# Altium PCB BugBuster_DAQ.PcbDoc (part 5 of 5)
Units mm, origin at the board's own origin, x right, y up, seen from the top; angles counter-clockwise.
Board outline 110 x 80 mm, 6 copper layers (Top Layer, Inner Layer 1, Inner Layer 2, Inner Layer 3, Inner Layer 4, Bottom Layer), stack 1.202 mm thick; 245 components, 205 nets, 1250 pads, 1565 vias.
Unrouted connection lines stored in the file: 8.
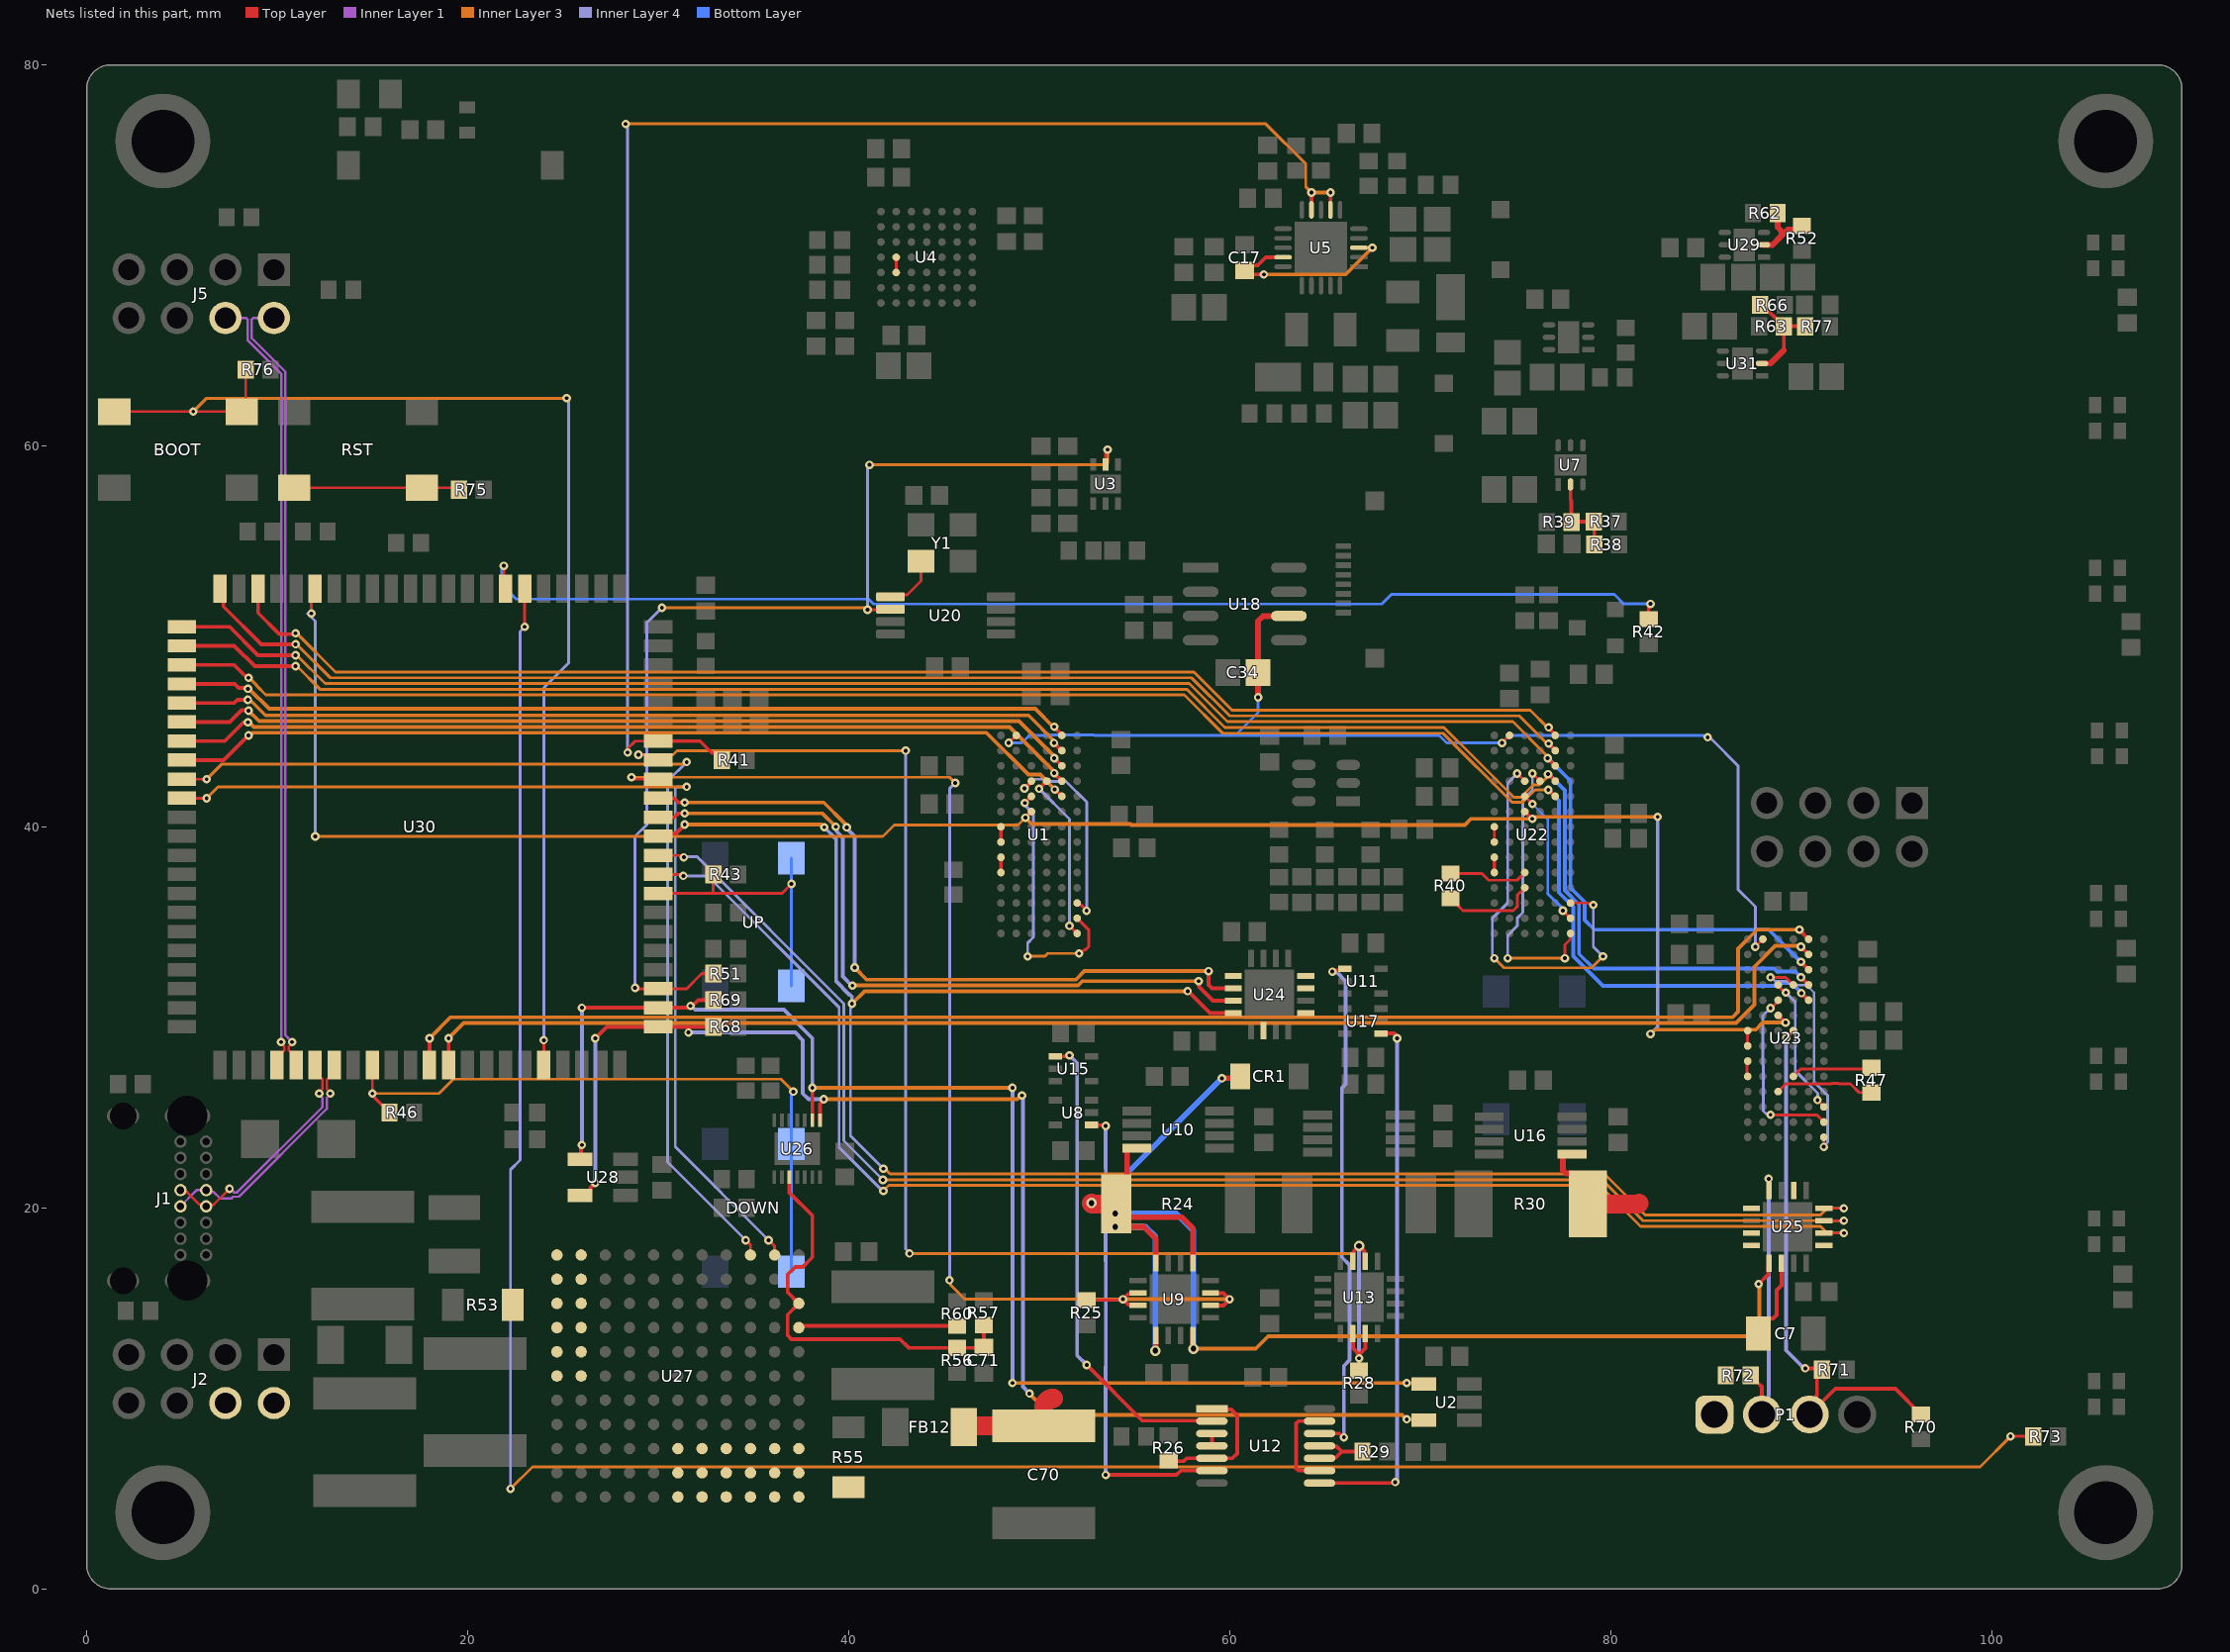
[diagram p8: the nets of this part, all layers, seen from the top]

## Via types
v1: diameter 0.55, hole 0.25, Top Layer to Bottom Layer, tented both sides, 1062 vias
v2: diameter 0.45, hole 0.2, Top Layer to Bottom Layer, tented both sides, 408 vias
v3: diameter 0.55, hole 0.3, Top Layer to Bottom Layer, tented both sides, 78 vias
v4: diameter 0.6, hole 0.35, Top Layer to Bottom Layer, tented both sides, 9 vias
v5: diameter 0.5, hole 0.2, Top Layer to Bottom Layer, tented both sides, 6 vias
v6: diameter 0.65, hole 0.35, Top Layer to Bottom Layer, tented both sides, 2 vias

## Nets (pads, with @x,y where several pads share a name; then routed paths per layer and width w, separated by ;. In a path a pad name is that pad's centre, name@x,y a point inside that pad or via, vN(x,y) a via of type N, cw(c..) or ccw(c..) an arc to the next point about the centre after c; other vN are vias at no path point) (continued)
NetR25_2: R25.2 U9.6 U9.7 U9.14 U9.15 U30.80 | length 66.1
  Top Layer w0.15: v2(28.6,42.6) 28.681,42.6 28.781,42.5 U30.80@30,42.5 ; R25.2@52.5,15.15 54.35,15.15 v2(54.4,15.2)
  Top Layer w0.2: U9.7@55.198,14.875 55.148,14.925 54.675,14.925 v2(54.4,15.2) 54.675,15.475 55.148,15.475 U9.6@55.198,15.525 ; U9.14@59.002,14.875 59.675,14.875 v2(60,15.2) 59.675,15.525 U9.15@59.002,15.525
  Inner Layer 3 w0.15: v2(28.6,42.6) 45.3,42.6 v2(45.6,42.3) ; v2(45.3,16.2) 45.357,16.143 45.357,15.943 46.1,15.2 v2(54.4,15.2)
  Inner Layer 3 w0.2: v2(54.4,15.2) v2(60,15.2)
  Inner Layer 4 w0.15: v2(45.3,16.2) 45.3,42 v2(45.6,42.3)
NetR26_2: R26.2 U12.1 U12.5 | length 7.1
  Top Layer w0.2: R26.2@57,6.45 57.25,6.7 57.6,6.7 57.75,6.85 60.15,6.85 60.4,7.1 60.4,9.1 60.083,9.417 59.108,9.417 U12.1@59.075,9.45
NetR28_2: R28.2 U13.6 U13.7 U13.14 U13.15 U30.81 | length 76.6
  Top Layer w0.15: v2(28.966,43.787) 28.978,43.775 29.725,43.775 U30.81@30,43.5
  Top Layer w0.2: U13.14@66.475,13.398 66.5,13.373 66.5,12.6 v2@66.8,12.3 ; U13.7@66.475,17.202 66.525,17.252 66.525,17.725 v3(66.8,18) 67.075,17.725 67.075,17.252 U13.6@67.125,17.202 ; R28.2@66.808,11.442 R28.2@66.8,11.45 v2(66.8,12.1) v2@66.8,12.3 ; U13.15@67.125,13.398 67.125,12.625 v2@66.8,12.3
  Inner Layer 3 w0.15: v2(28.966,43.787) 30.787,43.787 31,44 42.8,44 42.838,43.962 42.962,43.962 v2(43,44) ; v2(43.2,17.6) 66.4,17.6 v3(66.8,18)
  Inner Layer 4 w0.15: v2(43,44) 43,17.838 43.2,17.638 v2(43.2,17.6)
  Inner Layer 4 w0.2: v2(66.8,12.1) v3(66.8,18)
NetR29_2: R29.2 U12.10 U12.11 | length 3.8
  Top Layer w0.2: U12.10@64.725,6.85 64.76,6.885 65.585,6.885 65.9,7.2 ; U12.11@64.725,7.5 64.753,7.472 65.628,7.472 65.9,7.2 ; R29.2@67,7.05 66.85,7.2 65.9,7.2
NetR37_2: R37.2 R38.2 R39.2 U7.2 | length 4.4
  Top Layer w0.2: U7.2@77.9,57.972 77.9,57.175 77.95,57.125 R39.2@77.95,56 77.973,56.023 R37.2@79.13,56.023 79.15,56.003 R38.2@79.15,54.825
NetR40_1: R40.1 U22.C5 | length 4.2
  Top Layer w0.15: R40.1@71.6,37.55 73.25,37.55 73.6,37.2 75.1,37.2 U22.C5@75.5,37.6
NetR40_2: R40.2 U22.C4 | length 5
  Top Layer w0.15: R40.2@71.6,36.25 71.65,36.25 72,35.9 72,35.85 72.25,35.6 74.9,35.6 75.1,35.8 75.1,36.4 U22.C4@75.5,36.8
NetR41_1: R41.1 U5.7 U5.9 U30.82 | length 79.8
  Top Layer w0.15: v2(28.4,43.9) 28.4,44.1 28.8,44.5 U30.82@30,44.5
  Top Layer w0.2: U30.82@30,44.5 32.2,44.5 32.825,43.875 33.025,43.875 33.35,43.55 R41.1@33.35,43.5 ; U5.9@64.3,72.391 v2(64.3,73.3) ; U5.7@65.3,72.391 v2(65.3,73.3)
  Inner Layer 3 w0.15: v2(28.3,76.9) 61.9,76.9 64,74.8 64,73.6 v2(64.3,73.3)
  Inner Layer 3 w0.2: v2(64.3,73.3) v2(65.3,73.3)
  Inner Layer 4 w0.15: v2(28.3,76.9) 28.3,76.819 28.4,76.719 v2(28.4,43.9)
NetR42_2: R42.2 U30.7 | length 64.3
  Top Layer w0.15: v2(21.9,53.7) 21.9,52.6 U30.7@22,52.5 ; R42.2@82,50.9 82,51.519 82.1,51.619 v2(82.1,51.7)
  Bottom Layer w0.15: v2(21.9,53.7) 21.9,53.619 21.8,53.519 21.8,52.7 22.546,51.954 41.05,51.954 41.308,51.696 67.996,51.696 68.5,52.2 80.2,52.2 80.7,51.7 v2(82.1,51.7)
NetR47_1: R47.1 U23.D5 | length 4.3
  Top Layer w0.15: U23.D5@89.6,26.9 89.98,27.28 93.63,27.28 R47.1@93.7,27.35
NetR47_2: R47.2 U23.C4 | length 5.3
  Top Layer w0.15: U23.C4@88.8,26.1 89.2,26.5 91.596,26.5 91.623,26.527 91.977,26.527 92.004,26.5 92.6,26.5 93.05,26.05 R47.2@93.7,26.05
NetR51_1: R51.1 U3.5 U20.2 U30.69 | length 58.8
  Top Layer w0.15: v2(28.79,31.543) 28.833,31.5 U30.69@30,31.5 31.5,31.5 32.3,32.3 R51.1@32.9,32.3 ; v2(41,51.4) 42.175,51.4 U20.2@42.2,51.425 ; U3.5@53.5,59.025 53.5,59.619 53.6,59.719 v2(53.6,59.8)
  Inner Layer 3 w0.15: v2(30.2,51.5) 40.819,51.5 40.919,51.4 v2(41,51.4) ; v2(41.1,59) 53.512,59 53.6,59.088 v2(53.6,59.8)
  Inner Layer 4 w0.15: v2(28.79,31.543) 28.79,39.49 29.4,40.1 29.4,50.7 v2(30.2,51.5) ; v2(41,51.4) 41,58.819 41.1,58.919 v2(41.1,59)
NetR52_2: R52.2 R62.2 U29.2 | length 3.7
  Top Layer w0.3: U29.2@88.053,70.55 88.5,70.55 88.976,71.026 ; R62.2@88.775,72.225 88.775,71.475 88.976,71.274 88.976,71.026 ; R52.2@90.05,71.55 89.857,71.357 89.307,71.357 88.976,71.026
NetR53_2: R53.2 U27.F10 U27.F11 U27.G10 U27.G11 U27.H10 U27.H11 U27.J10 U27.J11 U27.K10 U27.K11 U27.L10 U27.L11
NetR55_1: R55.1 U27.A1 U27.A2 U27.A3 U27.A4 U27.A5 U27.A6 U27.B1 U27.B2 U27.B3 U27.B4 U27.B5 U27.B6 U27.C1 U27.C2 U27.C3 U27.C4 U27.C5 U27.C6
NetR60_2: R60.2 U27.H1 | length 8.3
  Top Layer w0.2: U27.H1@37.39,13.71 37.498,13.71 37.588,13.8 R60.2@45.7,13.8
NetR63_2: R63.2 R66.2 R77.2 U31.2 | length 5.6
  Top Layer w0.2: R66.2@87.85,67.4 87.85,67.35 88.175,67.025 88.34,67.025 88.641,66.723 88.647,66.723 88.72,66.65 88.77,66.65 89.095,66.325 R63.2@89.095,66.275 ; 89.1,65.025 89.1,66.27 R63.2@89.095,66.275 ; R77.2@90.217,66.275 R63.2@89.095,66.275
  Top Layer w0.3: U31.2@87.953,64.325 88.4,64.325 89.1,65.025
NetR68_1: R68.1 U2.5 U26.1 U28.5 U30.67 | length 74.2
  Top Layer w0.2: U28.5@25.9,20.65 26.2,20.65 26.45,20.9 26.45,21.05 v2(26.7,21.3) ; v2(26.7,28.9) 27.3,29.5 U30.67@30,29.5 31.6,29.5 ; v2(31.6,29.2) 31.6,29.5 ; R68.1@32.6,29.5 31.6,29.5 ; U26.1@38.5,24.599 38.5,25.458 38.7,25.658 v2(38.7,25.7) ; v2(69.3,8.9) 70.15,8.9 U2.5@70.2,8.85
  Inner Layer 3 w0.2: v2(38.7,25.7) 48.858,25.7 49.058,25.9 v2(49.1,25.9) ; v2(49.5,10.25) 50.625,9.125 69.058,9.125 69.283,8.9 v2(69.3,8.9)
  Inner Layer 4 w0.2: v2(26.7,21.3) v2(26.7,28.9) ; v2(31.6,29.2) 37.2,29.2 37.6,28.8 37.6,26 37.9,25.7 v2(38.7,25.7) ; v2(49.1,25.9) 49.148,25.852 49.148,10.602 v2(49.5,10.25)
NetR69_1: R69.1 U2.4 U26.2 U28.4 U30.68 | length 74.1
  Top Layer w0.2: U28.4@25.9,22.55 25.96,22.61 25.96,23.26 v2(26,23.3) ; v2(26,30.5) U30.68@30,30.5 31.7,30.5 32.1,30.9 R69.1@32.9,30.9 ; U26.2@38.1,24.599 v2(38.1,26.3) ; v2(69.3,10.8) 70.15,10.8 U2.4@70.2,10.75
  Inner Layer 3 w0.2: v2(38.1,26.3) v2(48.6,26.3) ; v2(48.6,10.8) v2(69.3,10.8)
  Inner Layer 4 w0.2: v2(26,23.3) v2(26,30.5) ; v2(31.7,30.6) 31.742,30.6 31.942,30.4 36.6,30.4 38.1,28.9 v2(38.1,26.3) ; v2(48.6,10.8) v2(48.6,26.3)
NetR73_2: R73.2 U30.6 | length 128.6
  Top Layer w0.15: v2(23,50.5) U30.6@23,52.5 ; v2(101,8) R73.2@102.2,8
  Inner Layer 3 w0.15: v2(22.25,5.25) 23.4,6.4 99.4,6.4 v2(101,8)
  Inner Layer 4 w0.15: v2(22.25,5.25) 22.25,22 22.75,22.5 22.75,50.25 v2(23,50.5)
NetR75_2: R75.2 RST.A1 RST.A2 | length 8.7
  Top Layer w0.15: RST.A2@10.9,57.8 RST.A1@17.6,57.8 19.45,57.8 R75.2@19.55,57.7
NetU1_A5: U1.A5 U1.A6 | length 0.8
  Top Layer w0.2: U1.A5@48,37.6 U1.A6@48,38.4
NetU1_A7: U1.A7 U1.A8 | length 0.8
  Top Layer w0.2: U1.A7@48,39.2 U1.A8@48,40
NetU1_C9: U1.C9 U22.C9 U23.C9 U30.17 | length 105.1
  Top Layer w0.15: v2(11.8,51.2) 11.8,52.3 U30.17@12,52.5
  Top Layer w0.2: v2(49.28,40.48) U1.C9@49.6,40.8 ; U22.C9@75.5,40.8 75.88,40.42 v2(75.895,40.42) ; U23.C9@88.8,30.1 89.18,29.72 v2(89.195,29.72)
  Inner Layer 3 w0.15: v2(12,39.5) 41.8,39.5 42.4,40.1 48.9,40.1 v2(49.28,40.48)
  Inner Layer 3 w0.2: v2(49.28,40.48) 49.608,40.152 54.787,40.152 54.839,40.1 72.35,40.1 72.67,40.42 v2(75.895,40.42) 75.963,40.42 76.067,40.525 v2(82.475,40.525) ; v2(82.1,29.125) 82.117,29.125 82.342,29.35 87.625,29.35 87.995,29.72 v2(89.195,29.72)
  Inner Layer 4 w0.15: v2(11.8,51.2) 11.6,51.2 12,50.8 v2(12,39.5)
  Inner Layer 4 w0.2: v2(82.1,29.125) 82.475,29.5 v2(82.475,40.525)
NetU1_C10: U1.C10 U1.F2 | length 14
  Top Layer w0.15: U1.F2@52,35.2 52.6,34.6 52.6,33.7 52.441,33.541 52.37,33.541 52.181,33.352 v2(52.1,33.352)
  Top Layer w0.2: v2(49.252,41.25) U1.C10@49.6,41.6
  Inner Layer 3 w0.15: v2(49.4,33.2) 50.294,33.2 50.446,33.352 v2(52.1,33.352)
  Inner Layer 4 w0.15: v2(49.252,41.25) 49.3,41.202 49.3,41.1 49.707,40.693 49.707,40.007 49.7,40 49.7,34.2 49.4,33.9 v2(49.4,33.2)
NetU1_C11: U1.C11 U1.F3 | length 10.9
  Top Layer w0.15: U1.F3@52,36 52.069,36 52.172,35.897 52.203,35.897 52.495,35.605 v2(52.495,35.595)
  Top Layer w0.2: v2(49.234,42.018) 49.255,42.018 49.6,42.363 U1.C11@49.6,42.4
  Inner Layer 4 w0.15: v2(49.234,42.018) 49.717,42.5 50.511,42.5 50.623,42.388 51.412,42.388 52.5,41.3 52.5,35.6 v2(52.495,35.595)
NetU1_D11: U1.D11 U1.F1 | length 9
  Top Layer w0.15: v2(51.6,34.8) U1.F1@52,34.4
  Top Layer w0.2: v2(50,42) U1.D11@50.4,42.4
  Inner Layer 4 w0.15: v2(50,42) 51.6,40.4 v2(51.6,34.8)
NetU1_E10: U1.E10 U30.30 | length 48.2
  Top Layer w0.2: U30.30@5,43.5 7.2,43.5 v2(8.5,44.8) ; v2(50.822,41.961) 50.83,41.961 51.191,41.6 U1.E10@51.2,41.6
  Inner Layer 3 w0.2: v2(8.5,44.8) 8.568,44.8 8.71,44.942 47.234,44.942 49.438,42.738 50.062,42.738 50.822,41.978 v2(50.822,41.961)
NetU1_E11: U1.E11 U30.29 | length 48.1
  Top Layer w0.2: U30.29@5,44.5 7.25,44.5 8.221,45.471 8.452,45.471 v2(8.469,45.488) ; v2(50.8,42.815) 50.8,42.8 U1.E11@51.2,42.4
  Inner Layer 3 w0.2: v2(8.469,45.488) 8.531,45.488 8.775,45.244 48.456,45.244 v2@50.9,42.8 ; v2(50.8,42.815) v2@50.885,42.815
NetU1_E12: U1.E12 U30.28 | length 47.7
  Top Layer w0.2: U30.28@5,45.5 7.5,45.5 8.127,46.127 8.469,46.127 v2(8.5,46.096) ; v2(50.8,43.6) U1.E12@51.2,43.2
  Inner Layer 3 w0.2: v2(8.5,46.096) 9.051,45.545 48.955,45.545 50.8,43.7 v2(50.8,43.6)
NetU1_E13: U1.E13 U30.27 | length 47.5
  Top Layer w0.2: U30.27@5,46.5 7.75,46.5 7.923,46.673 8.458,46.673 v2(8.46,46.672) ; v2(50.785,44.4) 51.185,44 U1.E13@51.2,44
  Inner Layer 3 w0.2: v2(8.46,46.672) 8.528,46.672 8.651,46.548 8.687,46.548 9.388,45.847 49.453,45.847 50.8,44.5 50.785,44.485 v2(50.785,44.4)
NetU1_E14: U1.E14 U30.26 | length 47.4
  Top Layer w0.2: U30.26@5,47.5 7.78,47.5 7.984,47.296 8.421,47.296 v2(8.469,47.249) ; v2(50.8,45.254) 50.8,45.227 51.2,44.827 U1.E14@51.2,44.8
  Inner Layer 3 w0.2: v2(8.469,47.249) 8.522,47.249 9.579,46.192 49.808,46.192 50.746,45.254 v2(50.8,45.254)
NetU4_C6: U4.C6 U4.D6 | length 0.8
  Top Layer w0.15: U4.C6@42.5,69.1 U4.D6@42.5,69.9
NetU20_1: U20.1 Y1.3 | length 3
  Top Layer w0.15: U20.1@42.2,52.075 42.295,52.17 43.07,52.17 43.8,52.9 Y1.3@43.8,53.95
NetU22_A5: U22.A5 U22.A6 | length 0.8
  Top Layer w0.2: U22.A5@73.9,37.6 U22.A6@73.9,38.4
NetU22_A7: U22.A7 U22.A8 | length 0.8
  Top Layer w0.15: U22.A7@73.9,39.2 U22.A8@73.9,40
NetU22_C10: U22.C10 U22.F2 | length 7.4
  Top Layer w0.15: U22.C10@75.5,41.6 v2(75.9,41.2) ; v2(77.5,35.6) U22.F2@77.9,35.2
  Bottom Layer w0.12: v2(75.9,41.2) 76.7,40.4 76.7,36.5
  Bottom Layer w0.15: 76.7,36.5 77.382,35.818 77.382,35.799 77.5,35.681 v2(77.5,35.6)
NetU22_C11: U22.C11 U22.F3 | length 21.1
  Top Layer w0.15: v2(75.1,42.8) U22.C11@75.5,42.4 ; U22.F3@77.9,36 78.8,36 78.843,35.957 79.043,35.957 v2(79.1,35.9)
  Inner Layer 3 w0.15: v2(73.9,33.1) 74.4,32.6 79,32.6 v2(79.6,33.2)
  Inner Layer 4 w0.15: v2(73.9,33.1) 73.9,33.181 73.8,33.281 73.8,35.2 74.6,36 74.6,42.3 v2(75.1,42.8) ; v2(79.1,35.9) 79.1,33.7 v2(79.6,33.2)
NetU22_D11: U22.D11 U22.F1 | length 15.2
  Top Layer w0.15: v2(75.9,42.8) U22.D11@76.3,42.4 ; v2(77.6,33.1) 77.6,33.8 77.897,34.097 77.897,34.397 U22.F1@77.9,34.4
  Inner Layer 3 w0.15: v2(74.6,33.1) v2(77.6,33.1)
  Inner Layer 4 w0.15: v2(74.6,33.1) 74.6,34.3 75.1,34.8 75.1,35.2 75.4,35.5 75.4,41.4 75.9,41.9 v2(75.9,42.8)
NetU22_E10: U22.E10 U23.E10 U30.25 | length 98.2
  Top Layer w0.2: U30.25@5,48.5 7.75,48.5 8.25,48 8.298,47.952 8.307,47.952 8.432,47.827 v2(8.5,47.827) ; v2(76.736,41.943) 76.746,41.943 77.09,41.6 U22.E10@77.1,41.6 ; v2(90.015,31.269) 90.023,31.269 90.392,30.9 U23.E10@90.4,30.9
  Inner Layer 3 w0.15: v2(8.5,47.827) 8.53,47.827 8.921,47.436 8.921,47.406 9.405,46.922 57.628,46.922 59.633,44.917 71.2,44.917 74.817,41.3 75.396,41.3 76.04,41.943 v2(76.736,41.943)
  Bottom Layer w0.2: v2(76.736,41.943) 77.3,41.38 77.3,36.547 78.045,35.802 78.045,33.202 79.599,31.648 88.587,31.648 88.739,31.8 89.5,31.8 90.015,31.285 v2(90.015,31.269)
NetU22_E11: U22.E11 U23.E11 U30.24 | length 99
  Top Layer w0.2: U30.24@5,49.5 7.75,49.5 8.823,48.427 10.965,48.427 v2(10.969,48.431) ; v2(76.719,42.764) 76.746,42.764 77.1,42.41 U22.E11@77.1,42.4 ; v2(90,32.1) U23.E11@90.4,31.7
  Inner Layer 3 w0.15: v2(10.969,48.431) 11.037,48.431 12.244,47.223 57.753,47.223 59.758,45.219 71.254,45.219 73.009,43.464 74.921,41.552 75.292,41.552 75.94,42.2 76.266,42.2 76.606,42.541 76.606,42.57 76.719,42.683 v2(76.719,42.764)
  Bottom Layer w0.2: v2(76.719,42.764) 76.756,42.764 77.602,41.918 77.602,36.672 78.346,35.927 78.346,33.327 79.121,32.552 88.587,32.552 88.739,32.4 89.7,32.4 v2(90,32.1)
NetU22_E12: U22.E12 U23.E12 U30.23 | length 97.3
  Top Layer w0.2: U30.23@5,50.5 7.5,50.5 8.996,49.004 10.965,49.004 v2(10.969,49.008) ; v2(76.7,43.6) 76.708,43.6 77.1,43.208 U22.E12@77.1,43.2 ; v2(89.993,32.907) U23.E12@90.4,32.5
  Inner Layer 3 w0.15: v2(10.969,49.008) 11.031,49.008 12.514,47.525 57.878,47.525 59.883,45.52 74.88,45.52 76.598,43.802 76.598,43.783 76.7,43.681 v2(76.7,43.6)
  Bottom Layer w0.2: v2(76.7,43.6) 76.719,43.6 77.903,42.416 77.903,36.797 78.648,36.052 78.648,35.1 79.148,34.6 88.3,34.6 v2(89.993,32.907)
NetU22_E13: U22.E13 U30.22 | length 74.1
  Top Layer w0.2: U30.22@7,52.5 7.183,52.317 7.183,51.567 9.165,49.585 v2(10.969,49.585) ; v2(76.752,44.367) 76.752,44.358 77.1,44.01 U22.E13@77.1,44
  Inner Layer 3 w0.15: v2(10.969,49.585) 11.031,49.585 12.789,47.827 58.003,47.827 60.008,45.822 75.216,45.822 76.671,44.367 v2(76.752,44.367)
NetU22_E14: U22.E14 U30.20 | length 72.1
  Top Layer w0.2: U30.20@9,52.5 9,51.228 10.114,50.114 10.921,50.114 v2(10.969,50.162) ; v2(76.752,45.221) 76.752,45.185 77.1,44.837 U22.E14@77.1,44.8
  Inner Layer 3 w0.15: v2(10.969,50.162) 11.031,50.162 13.065,48.128 58.128,48.128 60.133,46.123 75.783,46.123 76.685,45.221 v2(76.752,45.221)
NetU23_A5: U23.A5 U23.A6 | length 0.8
  Top Layer w0.15: U23.A5@87.2,26.9 87.173,26.927 87.173,27.673 U23.A6@87.2,27.7
NetU23_A7: U23.A7 U23.A8 | length 0.8
  Top Layer w0.15: U23.A7@87.2,28.5 U23.A8@87.2,29.3
NetU23_C10: U23.C10 U23.F2 | length 9.6
  Top Layer w0.15: v2(88.4,24.885) 88.405,24.88 90.82,24.88 U23.F2@91.2,24.5 ; v2(88.4,30.485) 88.434,30.485 88.8,30.851 U23.C10@88.8,30.9
  Inner Layer 4 w0.15: v2(88.4,24.885) 88.343,24.942 88.158,24.942 88.027,25.073 88.027,27.477 88,27.504 88,30.085 v2(88.4,30.485)
NetU23_C11: U23.C11 U23.F3 | length 7.4
  Top Layer w0.15: U23.C11@88.8,31.7 88.8,31.652 89.121,31.331 89.169,31.331 v2(89.2,31.3) ; v2(90.867,25.656) 90.867,25.644 91.2,25.311 U23.F3@91.2,25.3
  Inner Layer 4 w0.15: v2(89.2,31.3) 89.7,30.8 89.7,27.2 90.887,26.013 90.887,25.676 v2(90.867,25.656)
NetU23_D11: U23.D11 U23.F1 | length 13
  Top Layer w0.15: v2(88.4,32.1) 89.2,32.1 U23.D11@89.6,31.7 ; v2(91.2,23.2) U23.F1@91.2,23.7
  Inner Layer 4 w0.127: v2(88.4,32.1) 88.436,32.1 88.636,31.9 89.278,31.9 89.494,31.684 90.3,31.684 90.684,31.3 90.684,31.2
  Inner Layer 4 w0.15: 90.684,31.2 90.684,26.616 91.4,25.9 91.4,23.438 91.2,23.238 v2(91.2,23.2)
NetU23_E13: U23.E13 U30.57 | length 76.2
  Top Layer w0.2: U30.57@19,27.5 v2(19,28.9) ; v2(90,33.7) U23.E13@90.4,33.3
  Inner Layer 3 w0.2: v2(19,28.9) 19.8,29.7 86.595,29.7 87.447,30.553 87.55,30.655 87.55,32.65 88.653,33.753 89.771,33.753 89.775,33.748 89.952,33.748 v2(90,33.7)
NetU23_E14: U23.E14 U30.56 | length 78.3
  Top Layer w0.2: U30.56@18,27.5 v2(18,28.9) ; v2(89.919,34.6) 89.919,34.581 U23.E14@90.4,34.1
  Inner Layer 3 w0.2: v2(18,28.9) 19.102,30.002 86.402,30.002 86.7,30.3 86.7,33.6 87.7,34.6 v2(89.919,34.6)
NetU24_2: U24.2 U24.5 U24.7 U24.8 U24.13 | length 0
  Top Layer w0.2: U24.2@61.775,29.298 U24.2@61.787,29.285
NetU24_14: U24.14 U30.79 | length 39.3
  Top Layer w0.2: U30.79@30,41.5 30.85,41.5 31.071,41.279 v2(31.4,41.279) ; v2(58.9,32.425) 58.9,31.7 59.075,31.525 U24.14@60.198,31.525
  Inner Layer 3 w0.2: v2(31.4,41.279) 38.695,41.279 39.781,40.193 39.781,40.165 39.905,40.041 v2(39.905,39.973) ; v2(40.32,32.609) 40.952,31.976 51.926,31.976 52.375,32.425 v2(58.9,32.425)
  Inner Layer 4 w0.2: v2(39.905,39.973) 39.905,39.906 40.32,39.491 v2(40.32,32.609)
NetU24_15: U24.15 U30.78 | length 39.1
  Top Layer w0.2: U30.78@30,40.5 30.85,40.5 31.052,40.702 v2(31.4,40.702) ; v2(58.375,31.9) 58.409,31.866 58.409,31.591 59.125,30.875 U24.15@60.198,30.875
  Inner Layer 3 w0.2: v2(31.4,40.702) 38.633,40.702 v2(39.329,40.006) ; v2(40.205,31.663) 40.217,31.675 52.051,31.675 52.277,31.9 v2(58.375,31.9)
  Inner Layer 4 w0.2: v2(39.329,40.006) 39.377,39.958 39.377,39.746 39.7,39.423 39.7,32.136 40.173,31.663 v2(40.205,31.663)
NetU24_16: U24.16 U25.16 U30.77 | length 101.7
  Top Layer w0.15: U25.16@91.202,19.975 v2(92.25,19.975)
  Top Layer w0.2: U30.77@30,39.5 30.158,39.658 30.933,39.658 v2(31.4,40.125) ; v2(57.8,31.373) 57.827,31.373 58.975,30.225 U24.16@60.198,30.225
  Inner Layer 3 w0.15: v2(41.825,22.052) 41.906,22.052 42.183,21.775 79.675,21.775 81.825,19.625 91.025,19.625 91.375,19.975 v2(92.25,19.975)
  Inner Layer 3 w0.2: v2(31.4,40.125) 38.571,40.125 v2(38.721,39.975) ; v2(40.18,30.719) 40.834,31.373 v2(57.8,31.373)
  Inner Layer 4 w0.15: v2(40.18,30.719) 40.123,30.662 40.123,30.504 40.1,30.481 40.1,23.777 v2(41.825,22.052)
  Inner Layer 4 w0.2: v2(38.721,39.975) 39.35,39.346 39.35,31.878 40.018,31.211 40.043,31.211 40.18,31.073 v2(40.18,30.719)
NetU25_2: U25.2 U25.5 U25.7 U25.8 U25.13 | length 0.1
  Top Layer w0.2: U25.8@87.348,18.075 U25.8@87.398,18.025 ; U25.7@87.396,18.673 U25.7@87.398,18.675 ; U25.13@91.202,18.025 U25.13@91.252,18.075
NetU25_14: U25.14 U30.75 | length 75.6
  Top Layer w0.15: U30.75@30,37.5 31.171,37.5 31.246,37.425 v2(31.327,37.425) ; U25.14@91.202,18.675 v2(92.25,18.675)
  Inner Layer 3 w0.15: v2(41.825,20.884) 42.116,21.175 79.426,21.175 81.576,19.025 91.025,19.025 91.375,18.675 v2(92.25,18.675)
  Inner Layer 4 w0.15: v2(31.327,37.425) 32.6,37.425 39.5,30.525 39.5,23.17 41.785,20.884 v2(41.825,20.884)
NetU25_15: U25.15 U30.76 | length 75.5
  Top Layer w0.15: U30.76@30,38.5 31.169,38.5 31.269,38.4 v2(31.35,38.4) ; U25.15@91.202,19.325 v2(92.25,19.325)
  Inner Layer 3 w0.15: v2(41.805,21.468) 41.812,21.475 79.551,21.475 81.701,19.325 v2(92.25,19.325)
  Inner Layer 4 w0.15: v2@31.348,38.425 32.05,38.425 39.753,30.722 39.753,23.52 v2(41.805,21.468)
NetU27_L2: U27.L2 U30.32 | length 54
  Top Layer w0.15: U30.32@5,41.5 v2(6.3,41.5) ; v2(35.8,18.3) 36.12,17.98 U27.L2@36.12,17.52
  Inner Layer 3 w0.15: v2(6.3,41.5) 6.9,42.1 v2(31.5,42.1)
  Inner Layer 4 w0.15: v2(31.5,42.1) 30.988,42.1 30.9,42.012 30.9,23.2 v2(35.8,18.3)
NetU27_L3: U27.L3 U30.31 | length 55
  Top Layer w0.15: U30.31@5,42.5 v2(6.3,42.5) ; v2(34.6,18.3) 34.85,18.05 U27.L3@34.85,17.52
  Inner Layer 3 w0.15: v2(6.3,42.5) 7.1,43.3 31.319,43.3 31.419,43.4 v2(31.5,43.4)
  Inner Layer 4 w0.15: v2(31.5,43.4) 30.5,42.4 30.5,22.4 v2(34.6,18.3)
OK_KEY: DOWN.B1 DOWN.B2 R46.1 U30.53 | length 35.1
  Top Layer w0.15: U30.53@15,27.5 v2(15,26) 15.057,25.943 15.057,25.843 15.5,25.4 15.55,25.4 15.9,25.05 R46.1@15.9,25
  Inner Layer 3 w0.15: v2(15,26) 18.5,26 19.252,26.752 36.448,26.752 v2(37.1,26.1)
  Bottom Layer w0.15: DOWN.B2@37,16.65 DOWN.B1@37,23.35 37,25.919 37.1,26.019 v2(37.1,26.1)
OUT_DUT: C7.2 P1.1 R30.1 R72.2 U16.1 U25.10 | length 10.8
  Top Layer w0.2: C7.2@87.75,13.4 87.75,13.637 88.3,14.187 88.537,14.187 88.725,14.375 88.725,15.675 88.975,15.925 U25.10@88.975,17.098
  Top Layer w0.3: U16.1@77.972,22.825 77.579,22.825 77.5,22.746 77.5,21.976 77.676,21.8 77.95,21.8 78.8,20.95 R30.1@78.8,20.2
  Top Layer w1: R30.1@78.8,20.2 81.45,20.2 ccw(c81.45,20.25) 81.5,20.25
OUT_DUT_SNS: P1.2 R72.1 U25.4 | length 15.5
  Top Layer w0.2: R72.1@87.35,11.2 87.35,11.15 87.675,10.825 87.725,10.825 87.95,10.6 P1.2@87.95,9.15 ; v2(88.3,21.525) 88.313,21.512 88.313,20.915 U25.4@88.325,20.902
  Inner Layer 4 w0.2: P1.2@87.95,9.15 88.294,9.494 88.294,10.162 88.3,10.167 v2(88.3,21.525)
OUT_DUT_SNS-: P1.3 R70.1 R71.1 U23.D8 | length 28.9
  Top Layer w0.2: v2(89.225,28.925) U23.D8@89.6,29.3 ; v2(90.225,11.575) 91.025,11.575 R71.1@91.1,11.5 90.844,11.244 90.844,10.167 90.794,10.117 90.794,9.912 90.45,9.567 P1.3@90.45,9.15 91.8,10.5 94.95,10.5 R70.1@96.3,9.15
  Inner Layer 4 w0.2: v2(89.225,28.925) 89.225,12.516 v2@90.265,11.476
P4_BOOT: BOOT.B1 BOOT.B2 R76.1 U30.62 | length 64.5
  Top Layer w0.15: BOOT.B2@1.45,61.8 v2(5.6,61.8) BOOT.B1@8.15,61.8 ccw(c8.15,62) 8.35,62 R76.1@8.35,64 ; U30.62@24,27.5 v2(24,28.8)
  Inner Layer 3 w0.15: v2(5.6,61.8) 6.3,62.5 v2(25.2,62.5)
  Inner Layer 4 w0.15: v2(24,28.8) 24,47.3 25.3,48.6 25.3,62.319 25.2,62.419 v2(25.2,62.5)
REF_OUT: C34.2 U1.B14 U18.6 U22.B14 U23.B14 | length 59.2
  Top Layer w0.15: v2(48.407,44.407) U1.B14@48.8,44.8 ; v2(74.3,44.4) U22.B14@74.7,44.8 ; v2(87.6,33.7) U23.B14@88,34.1
  Top Layer w0.3: v2(61.5,46.8) C34.2@61.5,48.1 61.5,50.8 61.765,51.065 U18.6@63.116,51.065
  Inner Layer 4 w0.15: v2(85.1,44.7) 85.181,44.7 85.299,44.582 85.318,44.582 86.7,43.2 86.7,36.7 87.6,35.8 v2(87.6,33.7)
  Bottom Layer w0.15: v2(48.407,44.407) 49.107,44.407 49.5,44.8 50.581,44.8 50.608,44.827 52.873,44.827 52.9,44.8 60.3,44.8 ; v2(61.5,46.8) 61.5,46 60.3,44.8 ; v2(85.1,44.7) 85.043,44.757 84.899,44.757 84.862,44.794 74.694,44.794 v2(74.3,44.4) 71.4,44.4 71,44.8 60.3,44.8
RESET_2: U12.8 U17.1 | length 28.3
  Top Layer w0.2: U12.8@64.725,5.55 68.582,5.55 68.632,5.6 v2(68.7,5.6) ; U17.1@67.95,29.15 68.65,29.15 68.8,29 v2(68.8,28.9)
  Inner Layer 4 w0.2: v2(68.7,5.6) 68.8,5.7 v2(68.8,28.9)
RESET_51: U12.2 U15.1 | length 25.2
  Top Layer w0.2: U15.1@50.85,27.95 51.55,27.95 v2(51.6,28) ; v2(52.5,11.75) 55.424,8.826 59.049,8.826 U12.2@59.075,8.8
  Inner Layer 4 w0.2: v2(51.6,28) 52,27.6 52,12.25 v2(52.5,11.75)
SET_2: U11.1 U12.12 | length 27.3
  Top Layer w0.2: U12.12@64.725,8.15 65.767,8.15 65.969,7.948 v2(66,7.948) ; v2(65.4,32.4) 65.448,32.448 65.773,32.448 65.875,32.55 U11.1@66.05,32.55
  Inner Layer 4 w0.2: v2(65.4,32.4) 65.448,32.352 65.648,32.352 66.1,31.9 66.1,26.5 65.9,26.3 65.9,17.4 66.3,17 66.3,12 66,11.7 v2(66,7.948)
SET_51: U8.1 U12.6 | length 24.8
  Top Layer w0.2: U8.1@52.75,24.35 52.76,24.34 53.46,24.34 v2(53.5,24.3) ; v2(53.5,5.973) 57.208,5.973 57.435,6.2 U12.6@59.075,6.2
  Inner Layer 4 w0.2: v2(53.5,5.973) 53.5,11.646 53.504,11.65 53.504,17.208 53.498,17.214 53.498,19.908 53.504,19.914 53.504,22.047 53.5,22.051 v2(53.5,24.3)
SR_1: U12.3 U12.4 | length 0.7
  Top Layer w0.2: U12.4@59.075,7.5 U12.3@59.075,8.15
SR_2: U12.9 U12.13 | length 4.9
  Top Layer w0.2: U12.9@64.725,6.2 63.617,6.2 63.5,6.317 63.5,8.683 63.617,8.8 U12.13@64.725,8.8
UP_KEY: R43.1 U30.74 UP.B1 UP.B2 | length 14.9
  Top Layer w0.15: U30.74@30,36.5 32.9,36.5 ; R43.1@32.9,37.5 32.9,36.5 ; v2(37,37) 36.5,36.5 32.9,36.5
  Bottom Layer w0.15: UP.B2@37,31.65 UP.B1@37,38.35
USB_FS_N: J1.A7 J1.B7 U30.50 | length 12.7
  Top Layer w0.127: J1.B7@4.925,20.925 5.025,20.825 5.275,20.825 5.925,20.175 6.175,20.175 J1.A7@6.275,20.075 6.363,20.163 6.663,20.163 v2(7.5,21) ; U30.50@12,27.5 12,27.1 12.287,26.813 12.311,26.813 12.386,26.739 12.386,26.236 12.211,26.062 v2(12.211,26)
  Inner Layer 1 w0.127: v2(7.5,21) 7.549,21 7.736,20.813 7.901,20.813 12.386,25.298 12.386,25.764 12.211,25.938 v2(12.211,26)
USB_FS_P: J1.A6 J1.B6 U30.51 | length 12.8
  Top Layer w0.127: v2(12.789,26) 12.789,26.062 12.614,26.236 12.614,26.739 12.689,26.813 12.713,26.813 13,27.1 U30.51@13,27.5
  Inner Layer 1 w0.127: J1.B6@4.925,20.075 5.775,20.925 J1.A6@6.275,20.925 6.375,20.825 6.675,20.825 7,20.5 7.622,20.5 7.622,20.51 7.697,20.585 7.995,20.585 12.614,25.203 12.614,25.764 12.789,25.938 v2(12.789,26)
USB_HS_N: J5.4 U30.48 | length 41.5
  Top Layer w0.127: U30.48@10,27.5 10,27.9 10.287,28.186 10.311,28.186 10.386,28.261 10.386,28.464 10.212,28.638 v2(10.212,28.7)
  Inner Layer 1 w0.127: J5.4@7.29,66.71 8.371,66.71 8.446,66.636 8.446,65.554 10.212,63.789 v2(10.212,28.7)
  Bottom Layer w0.2: J5.4@7.29,66.71 J5.4@7.539,66.71
USB_HS_P: J5.2 U30.49 | length 41.7
  Top Layer w0.127: v2(10.789,28.7) 10.789,28.638 10.614,28.464 10.614,28.261 10.689,28.186 10.713,28.186 11,27.9 U30.49@11,27.5
  Inner Layer 1 w0.127: J5.2@9.83,66.71 8.749,66.71 8.674,66.636 8.674,65.649 10.44,63.883 10.44,29.059 10.789,28.711 v2(10.789,28.7)
  Bottom Layer w0.2: J5.2@9.581,66.71 J5.2@9.83,66.71
V_DUT: C70.2 CR1.2 FB12.2 R24.2 U9.1 U9.4 U9.9 U9.12 U10.8 U25.9 | length 86.1
  Top Layer w0.2: v2(87.775,16) 88.286,16.511 88.286,17.058 U25.9@88.325,17.098
  Top Layer w0.3: R24.2@54.05,19.65 54.7,19 55.5,19 56.125,18.375 U9.4@56.125,17.102 ; R24.2@54.05,20.15 54.7,19.5 57.5,19.5 58.075,18.925 U9.1@58.075,17.102 ; R24.2@54.05,20.2 54.625,20.775 54.625,23.046 54.704,23.125 U10.8@55.128,23.125 ; v3(56.1,12.5) 56.125,12.525 U9.9@56.125,13.298 ; U9.12@58.075,12.996 U9.12@58.075,13.298 ; U9.12@58.075,12.995 58.075,12.627 v3(58.1,12.602) ; v2(59.6,26.8) 60.463,26.8 CR1.2@60.563,26.9
  Top Layer w1: FB12.2@46.05,8.5 cw(c46.1,8.5) 46.1,8.55 C70.2@50.25,8.55 50.25,9.5 cw(c50.75,9.5) 50.75,10 ; v3(52.75,20.25) ccw(c52.8,20.25) 52.8,20.2 R24.2@54.05,20.2
  Inner Layer 3 w0.2: v3(58.1,12.602) 61.377,12.602 62.025,13.25 87.425,13.25 87.823,13.648 87.823,15.952 v2(87.775,16)
  Bottom Layer w0.3: v3(52.75,20.25) 52.798,20.298 53.098,20.298 v2(59.6,26.8) ; v3(54,19.7) 57.2,19.7 58.102,18.798 v3(58.1,12.602) ; v3(54.002,19) 55.6,19 56.1,18.5 v3(56.1,12.5)
V_FB_DCDC: C71.1 R56.1 R57.2 U26.10 U27.J1 | length 21.8
  Top Layer w0.2: U26.10@36.9,21.601 36.9,20.8 38.1,19.6 38.1,17.4 37.6,16.9 37.2,16.9 36.8,16.5 36.8,15.57 U27.J1@37.39,14.98 36.8,14.39 36.8,13.3 37,13.1 42.7,13.1 43.15,12.65 R56.1@45.7,12.65 47.075,12.65 C71.1@47.1,12.675 R57.2@47.1,13.85
VADJ1_BUCK: J2.2
VADJ2_BUCK: J2.4
VREG: C17.1 U5.3 U5.14 | length 10.4
  Top Layer w0.2: v2(61.8,69) 61,69 C17.1@60.8,69.2 61.083,69.483 61.483,69.483 61.9,69.9 U5.14@62.809,69.9 ; U5.3@66.791,70.4 v2(67.5,70.4)
  Inner Layer 3 w0.2: v2(61.8,69) 66.1,69 v2(67.5,70.4)
pads on no net: D11.1 E1.3 E1.4 J1.A8 J1.B8 U1.A9 U1.A10 U1.A12 U1.B5 U1.B8 U1.B12 U1.D5 U1.D8 U1.D9 U4.A2 U4.B1 U4.C1 U4.D1 U7.4 U9.10 U10.4 U13.10 U14.4 U16.4 U18.1 U18.3 U18.5 U18.7 U18.8 U21.3 U21.5 U22.A9 U22.A10 U22.A12 U22.B5 U22.B8 U22.B12 U22.D5 U22.D8 U22.D9 U22.D13 U23.A9 U23.A10 U23.A12 U23.B5 U23.B8 U23.B12 U23.C5 U23.C8 U23.D9 U23.D13 U24.9 U26.4 U26.5 U26.12 U26.14 U27.F1 U27.G1 U27.G2 U27.J2 U30.16 U30.34 U30.35 U30.36 U30.37 U30.38 U30.39 U30.41 U30.42 U30.43 U30.44 U30.45 U30.46 U30.58 U30.61 U30.66 U30.88 U31.4

## Polygon pours and split planes (outlines as drawn)
GND on Top Layer "NetC85" (solid, pour order 30): 108,0 ccw(c108,2) 110,2 110,79 ccw(c109,79) 109,80 1,80 ccw(c1,79) 0,79 0,2 ccw(c2,2) 2,0
NetC14_2 on Top Layer "NetC85" (solid, pour order 22): 58.5,69.25 cw(c59,69.25) 59,69.75 63,69.75 cw(c63,69.5) 63.25,69.5 ccw(c63.75,69.5) 63.75,69 64.5,69 64.5,67.75 cw(c64,67.75) 64,67.25 63,67.25 ccw(c63,66.75) 62.5,66.75 62.5,65.5 cw(c62.25,65.5) 62.25,65.25 59,65.25 cw(c59,65.75) 58.5,65.75
NetCR1_1 on Top Layer "NetC85" (solid, pour order 15): 69,22.25 cw(c69.25,22.25) 69.25,22.5 73.75,22.5 cw(c73.75,22.25) 74,22.25 74,16.5 cw(c73.5,16.5) 73.5,16 69.5,16 cw(c69.5,16.5) 69,16.5
V_DUT on Top Layer "NetC85" (solid, pour order 12): 53.25,7.5 ccw(c53.25,7.75) 53.5,7.75 53.5,9.25 ccw(c53.25,9.25) 53.25,9.5 53,9.5 cw(c53,10.25) 52.25,10.25 52.25,11.75 ccw(c51.75,11.75) 51.75,12.25 cw(c51.75,12.5) 51.5,12.5 51.5,17.5 cw(c52.5,17.5) 52.5,18.5 55,18.5 55,22 49,22 ccw(c49,21) 48,21 48,12.75 48,11 48,10.75 cw(c47.5,10.75) 47.5,10.25 45.5,10.25 ccw(c45.5,9.75) 45,9.75 45,7.75 ccw(c45.25,7.75) 45.25,7.5
NetC69_2 on Top Layer "NetC85" (solid, pour order 0): 45,7.5 45,9.75 cw(c45.5,9.75) 45.5,10.25 47.599,10.25 ccw(c47.594,10.647) 47.99,10.652 ccw(c47.5,10.75) 48,10.75 48,11.562 48,11.875 ccw(c47.875,11.875) 47.875,12 47.25,12 39.5,12 ccw(c39.5,11.5) 39,11.5 39,10 cw(c38.5,10) 38.5,9.5 37,9.5 ccw(c37,9) 36.5,9 36.5,8.5 ccw(c37,8.5) 37,8 37.5,8 cw(c37.5,7.5) 38,7.5
OUT_DUT on Top Layer "NetC85" (solid, pour order 24): 84,22.5 cw(c84,22) 84.5,22 84.5,21.25 84.5,16 ccw(c85.75,16) 85.75,14.75 88.162,14.75 cw(c88.162,14.281) 88.631,14.281 88.631,12.631 cw(c88.5,12.631) 88.5,12.5 87.5,12.5 ccw(c87.5,11.75) 86.75,11.75 86.75,8.5 cw(c86.25,8.5) 86.25,8 82.25,8 cw(c82.25,9) 81.25,9 81.25,14.25 ccw(c80.5,14.25) 80.5,15 78.5,15 cw(c78.5,15.75) 77.75,15.75 77.75,22.25 cw(c78,22.25) 78,22.5
20V_USB on Top Layer "NetC85" (solid, pour order 23): 43,67.75 cw(c43.25,67.75) 43.25,68 45,68 cw(c45,67.75) 45.25,67.75 45.25,59.5 cw(c45,59.5) 45,59.25 43.25,59.25 cw(c43.25,59.5) 43,59.5 43,62.75
NetC85_1 on Top Layer "NetC85" (solid, pour order 6): 14.975,78.1 14.975,77.1 14.975,76.1 17.1,76.1 17.1,78.1
20V_USB on Top Layer "NetC85" (solid, pour order 7): 3.5,11.5 ccw(c4,11.5) 4,11 10.5,11 cw(c10.5,10.5) 11,10.5 11,9 ccw(c11.5,9) 11.5,8.5 17,8.5 ccw(c17,9) 17.5,9 17.5,11 ccw(c17,11) 17,11.5 14.5,11.5 cw(c14.5,12) 14,12 14,13.5 ccw(c13.5,13.5) 13.5,14 4,14 ccw(c4,13.5) 3.5,13.5
NetC66_2 on Top Layer "NetC85" (solid, pour order 8): 20,19 21,19 cw(c21,18.5) 21.5,18.5 21.5,14 ccw(c22,14) 22,13.5 23,13.5 cw(c23,13) 23.5,13 23.5,11 cw(c23,11) 23,10.5 18.099,10.5 cw(c18.099,11.099) 17.5,11.099 ccw(c17.09,11.099) 17.09,11.51 14.402,11.51 cw(c14.402,11.912) 14,11.912 14,13.599 ccw(c13.68,13.599) 13.68,13.92 11.98,13.92 cw(c11.98,14.4) 11.5,14.4 11.5,16 cw(c12,16) 12,16.5 17,16.5 ccw(c17,17) 17.5,17 17.5,18.5 cw(c18,18.5) 18,19
NetR53_2 on Top Layer "NetC85" (solid, pour order 9): 21.5,17.5 cw(c22,17.5) 22,18 26,18 cw(c26,17.5) 26.5,17.5 26.5,11 cw(c26,11) 26,10.5 24,10.5 cw(c24,11) 23.5,11 23.5,13 ccw(c23,13) 23,13.5 22,13.5 cw(c22,14) 21.5,14
NetR55_1 on Top Layer "NetC85" (solid, pour order 10): 40,3 41,3 ccw(c41,3.5) 41.5,3.5 41.5,6 ccw(c41,6) 41,6.5 38.5,6.5 cw(c38.5,7) 38,7 38,7.5 ccw(c37.5,7.5) 37.5,8 31,8 ccw(c31,7.5) 30.5,7.5 30.5,4 ccw(c31.5,4) 31.5,3
NetR24_1 on Top Layer "NetC85" (solid, pour order 14): 59.5,21.5 cw(c60,21.5) 60,22 64,22 cw(c64,21.5) 64.5,21.5 64.5,18 cw(c64.25,18) 64.25,17.75 64,17.75 ccw(c64,17.5) 63.75,17.5 63.75,14 cw(c63.5,14) 63.5,13.75 63.25,13.75 cw(c63.25,14) 63,14 63,16.5 ccw(c62.75,16.5) 62.75,16.75 61.5,16.75 ccw(c61.5,16.5) 61.25,16.5 61.25,14 cw(c61,14) 61,13.75 60.75,13.75 cw(c60.75,14) 60.5,14 60.5,17.5 ccw(c60.25,17.5) 60.25,17.75 59.75,17.75 cw(c59.75,18) 59.5,18
3V3_ESP on Top Layer "NetC85" (solid, pour order 16): 27.75,46.5 ccw(c28.25,46.5) 28.25,46 36.25,46 ccw(c36.25,46.25) 36.5,46.25 36.5,50.25 ccw(c36,50.25) 36,50.75 34,50.75 ccw(c34,50.25) 33.5,50.25 33.5,49.5 cw(c33,49.5) 33,49 28.25,49 ccw(c28.25,48.5) 27.75,48.5
3V3_ESP on Top Layer "NetC85" (solid, pour order 17): 36.75,71.25 cw(c36.75,71.75) 36.25,71.75 36.25,76 cw(c36.75,76) 36.75,76.5 41.5,76.5 cw(c41.5,76) 42,76 42,73.5 ccw(c42.25,73.5) 42.25,73.25 cw(c42.25,72.75) 42.75,72.75 42.75,71.5 cw(c42.5,71.5) 42.5,71.25
5V3_BUCK on Top Layer "NetC85" (solid, pour order 19): 45.25,71.25 ccw(c45.5,71.25) 45.5,71 47,71 ccw(c47,71.25) 47.25,71.25 cw(c47.5,71.25) 47.5,71.5 51.75,71.5 ccw(c51.75,72) 52.25,72 52.25,76 ccw(c51.75,76) 51.75,76.5 45.75,76.5 ccw(c45.75,76) 45.25,76
5V3_BUCK on Top Layer "NetC85" (solid, pour order 20): 53.75,69 cw(c54.5,69) 54.5,69.75 58,69.75 cw(c58,69.25) 58.5,69.25 58.5,64.75 cw(c58,64.75) 58,64.25 54.25,64.25 cw(c54.25,64.75) 53.75,64.75
GND on Inner Layer 2 "NetC85" (solid, pour order 26): 108,0 ccw(c108,2) 110,2 110,79 ccw(c109,79) 109,80 1,80 ccw(c1,79) 0,79 0,2 ccw(c2,2) 2,0
3V3_ESP on Inner Layer 2 "NetC85" (solid, pour order 1): 35.5,77.5 ccw(c35.5,78.5) 36.5,78.5 cw(c38,78.5) 38,80 73,80 cw(c73,78) 75,78 75,52.25 cw(c73,52.25) 73,50.25 61.25,50.25 cw(c61.25,51.25) 60.25,51.25 60.25,55.5 cw(c61.5,55.5) 61.5,56.75 67.435,56.75 ccw(c67.435,59.315) 70,59.315 70,76.5 ccw(c69,76.5) 69,77.5 45,77.5 ccw(c45,76) 43.5,76 43.5,72.5 cw(c41.5,72.5) 41.5,70.5 39.04,70.5 ccw(c39.04,67.96) 36.5,67.96 36.5,26.5 36.5,23.765 cw(c33.935,23.765) 33.935,21.2 15.6,21.2 cw(c15.6,22.8) 14,22.8 14,30.4 cw(c15.1,30.4) 15.1,31.5 24.4,31.5 28.5,31.5 ccw(c28.5,32.5) 29.5,32.5 29.5,49.5 29.5,49.935 ccw(c26.935,49.935) 26.935,52.5 5,52.5 cw(c5,54) 3.5,54 3.5,70 cw(c4.5,70) 4.5,71 28,71 ccw(c28,72.5) 29.5,72.5 29.5,74.96 cw(c32.04,74.96) 32.04,77.5
5V3_BUCK on Inner Layer 2 "NetC85" (solid, pour order 2): 43.5,38 43.5,42.5 cw(c44,42.5) 44,43 48.5,43 cw(c48.5,42.5) 49,42.5 49,39.5 cw(c48.75,39.5) 48.75,39.25 48.25,39.25 ccw(c48.25,39) 48,39 48,32.5 ccw(c49,32.5) 49,31.5 54.5,31.5 ccw(c54.5,32.5) 55.5,32.5 55.5,51.5 ccw(c54.5,51.5) 54.5,52.5 50,52.5 cw(c50,53.5) 49,53.5 49,58.5 cw(c50.5,58.5) 50.5,60 ccw(c50.5,62.5) 53,62.5 53,68.5 ccw(c52,68.5) 52,69.5 46,69.5 cw(c46,70.5) 45,70.5 45,76 cw(c46.5,76) 46.5,77.5 55.96,77.5 cw(c55.96,75.46) 58,75.46 58,72 ccw(c58.75,72) 58.75,71.25 62,71.25 cw(c62,70.75) 62.5,70.75 62.5,65.5 cw(c61.75,65.5) 61.75,64.75 ccw(c61.75,64) 61,64 61,63.5 cw(c60.5,63.5) 60.5,63 58.5,63 ccw(c58.5,62.5) 58,62.5 58,55.5 ccw(c59,55.5) 59,54.5 cw(c59,54) 59.5,54 59.5,47.5 ccw(c60.5,47.5) 60.5,46.5 66,46.5 cw(c66,45.5) 67,45.5 67,44 ccw(c68,44) 68,43 74.5,43 cw(c74.5,42.5) 75,42.5 75,40.5 cw(c74.5,40.5) 74.5,40 70.5,40 ccw(c70.5,39) 69.5,39 69.5,33 ccw(c70.5,33) 70.5,32 86.5,32 cw(c86.5,31.5) 87,31.5 87,23 cw(c85.5,23) 85.5,21.5 76.5,21.5 ccw(c76.5,20.5) 75.5,20.5 75.5,9 cw(c74.5,9) 74.5,8 61.5,8 cw(c61.5,9) 60.5,9 60.5,11.5 cw(c61.5,11.5) 61.5,12.5 69.5,12.5 ccw(c69.5,14) 71,14 71,20.5 ccw(c70,20.5) 70,21.5 50,21.5 cw(c50,22) 49.5,22 49.5,25.5 ccw(c48.5,25.5) 48.5,26.5 46.04,26.5 cw(c46.04,29.04) 43.5,29.04
20V_USB on Inner Layer 2 "NetC85" (solid, pour order 21): 3,13.5 cw(c4,13.5) 4,14.5 33.935,14.5 ccw(c33.935,17.065) 36.5,17.065 36.5,68.197 cw(c38.791,68.197) 38.791,70.488 44.012,70.488 cw(c44.012,69.5) 45,69.5 ccw(c45.5,69.5) 45.5,69 48,69 cw(c48,68.5) 48.5,68.5 48.5,51 cw(c48,51) 48,50.5 44,50.5 ccw(c44,50) 43.5,50 43.5,6 cw(c41,6) 41,3.5 23.565,3.5 cw(c23.565,6.065) 21,6.065 21,9 ccw(c19.5,9) 19.5,10.5 4,10.5 cw(c4,11.5) 3,11.5
5V_LDO2 on Inner Layer 2 "NetC85" (solid, pour order 5): 94,20.5 ccw(c94,21) 94.5,21 94.5,38 ccw(c93.5,38) 93.5,39 83.5,39 ccw(c83.5,38) 82.5,38 82.5,29.5 ccw(c82.89,29.5) 82.89,29.11 86.046,29.11 86.046,22.556 86.944,22.556 87,22.5 87,21 ccw(c87.5,21) 87.5,20.5
5V_LDO1 on Inner Layer 2 "NetC85" (solid, pour order 4): 81.5,33 cw(c80.5,33) 80.5,32 70.5,32 cw(c70.5,33) 69.5,33 69.5,39 69.5,40.5 69.5,49 cw(c70.5,49) 70.5,50 80.5,50 cw(c80.5,49) 81.5,49
5V_LDO on Inner Layer 2 "NetC85" (solid, pour order 3): 43.5,43.5 ccw(c44,43.5) 44,43 48.5,43 cw(c48.5,42.5) 49,42.5 49,39.5 cw(c48.75,39.5) 48.75,39.25 ccw(c48.75,38.5) 48,38.5 48,31.5 55.5,31.5 55.5,49 ccw(c54.5,49) 54.5,50 44.5,50 ccw(c44.5,49) 43.5,49
NetR24_1 on Inner Layer 2 "NetC85" (solid, pour order 13): 53.5,13.5 ccw(c54,13.5) 54,13 70,13 ccw(c70,13.5) 70.5,13.5 70.5,18 ccw(c70,18) 70,18.5 54,18.5 ccw(c54,18) 53.5,18
GND on Inner Layer 1 "NetC85" (solid, pour order 25): 108,0 ccw(c108,2) 110,2 110,79 ccw(c109,79) 109,80 1,80 ccw(c1,79) 0,79 0,2 ccw(c2,2) 2,0
GND on Inner Layer 3 "NetC85" (solid, pour order 27): 108,0 ccw(c108,2) 110,2 110,79 ccw(c109,79) 109,80 1,80 ccw(c1,79) 0,79 0,2 ccw(c2,2) 2,0
GND on Inner Layer 4 "NetC85" (solid, pour order 28): 108,0 ccw(c108,2) 110,2 110,79 ccw(c109,79) 109,80 1,80 ccw(c1,79) 0,79 0,2 ccw(c2,2) 2,0
GND on Bottom Layer "NetC85" (solid, pour order 29): 108,0 ccw(c108,2) 110,2 110,79 ccw(c109,79) 109,80 1,80 ccw(c1,79) 0,79 0,2 ccw(c2,2) 2,0

## Silkscreen, mask and mechanical layers (free items; w line width, h text height)
Top Overlay:
  drawing of 9 lines, arcs and shapes, not listed
  text "Powered By Analog Devices, Engineered to Excel" at 27.071,77.933 h2
  text "Made with Love / by Lorenzo" at 84.475,74.15 h3
Bottom Overlay:
  drawing of 63 lines, arcs and shapes, not listed
Top Solder:
  lines w0.344: 19.812,76.6 19.975,76.438
  lines w0.45: 19.975,74.113 ccw(c22.54,74.113) 20.726,72.299 26.249,66.776 cw(c24.435,64.962) 27,64.962 27,54.3
Route Tool Path:
  lines w0.2: 0,1.27 ccw(c1.27,1.27) 1.27,0 39,0 108.73,0 ccw(c108.73,1.27) 110,1.27 110,78.73 ccw(c108.73,78.73) 108.73,80 1.27,80 ccw(c1.27,78.73) 0,78.73 0,1.27

## Text inside footprints (layer, text, board x,y; h text height)
CR1: Mechanical 13 "*" at 63.561,27.535 h1.27 r180
U9: Mechanical 13 "*" at 57.765,16.968 h1.27 r270
U13: Mechanical 13 "*" at 68.568,14.635 h1.27 r180
U24: Mechanical 13 "*" at 61.435,29.433 h1.27 r90
U25: Mechanical 13 "*" at 89.965,20.767 h1.27 r270